# Altium PCB Battery Reader.PcbDoc
Units mm, origin at the board's own origin, x right, y up, seen from the top; angles counter-clockwise.
Board outline 60.95 x 60.95 mm, 4 copper layers (Top Layer, GND, 3V3, Bottom Layer), stack 1.62 mm thick; 71 components, 43 nets, 267 pads, 31 vias.
Unrouted connection lines stored in the file: 65.
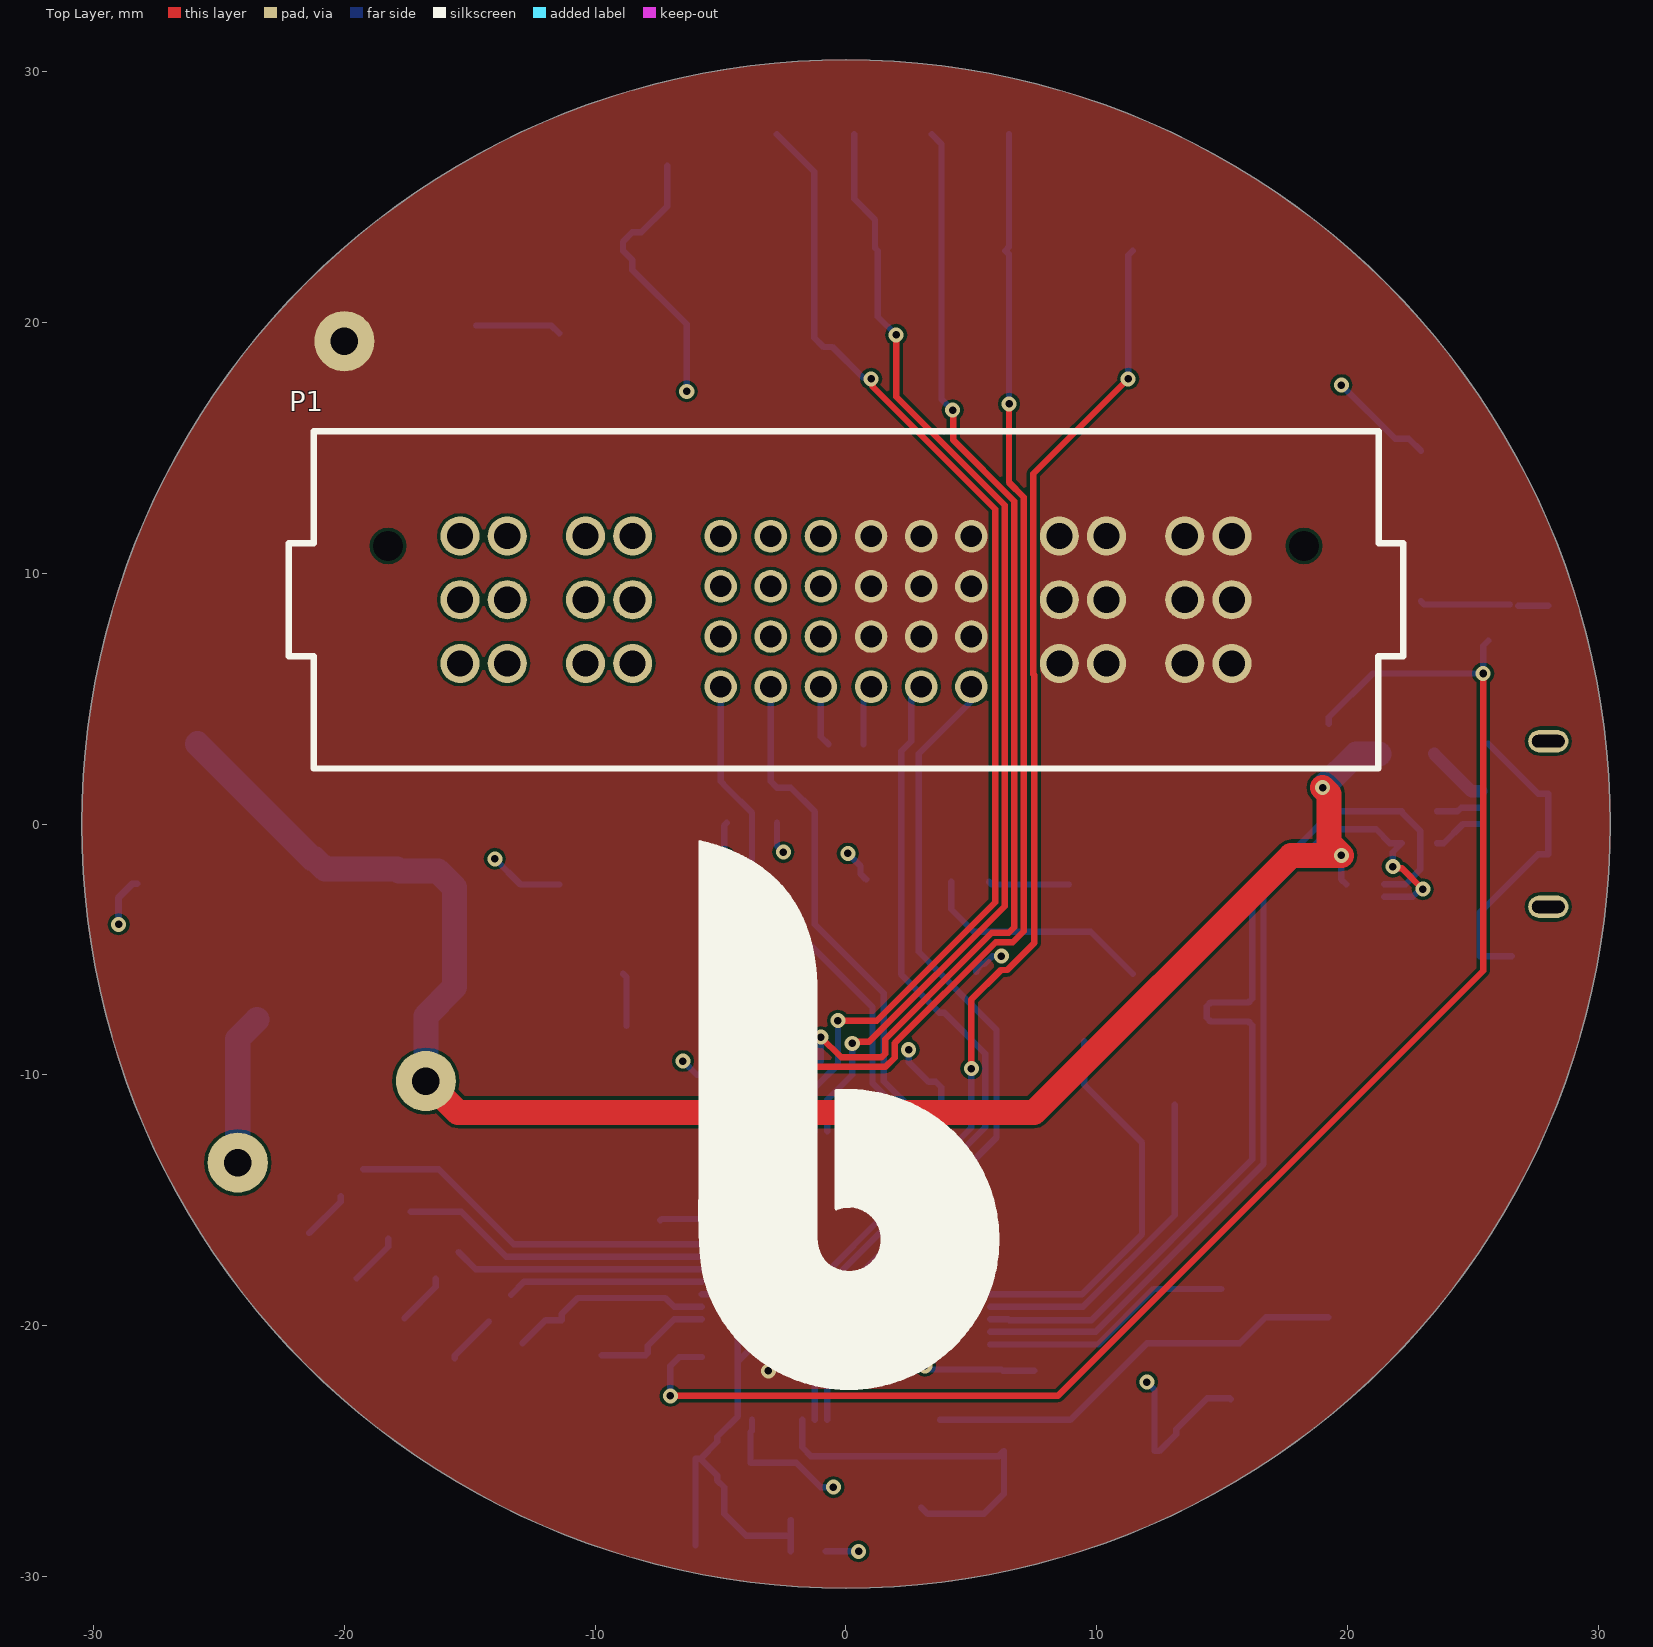
[diagram p0: Top Layer view]
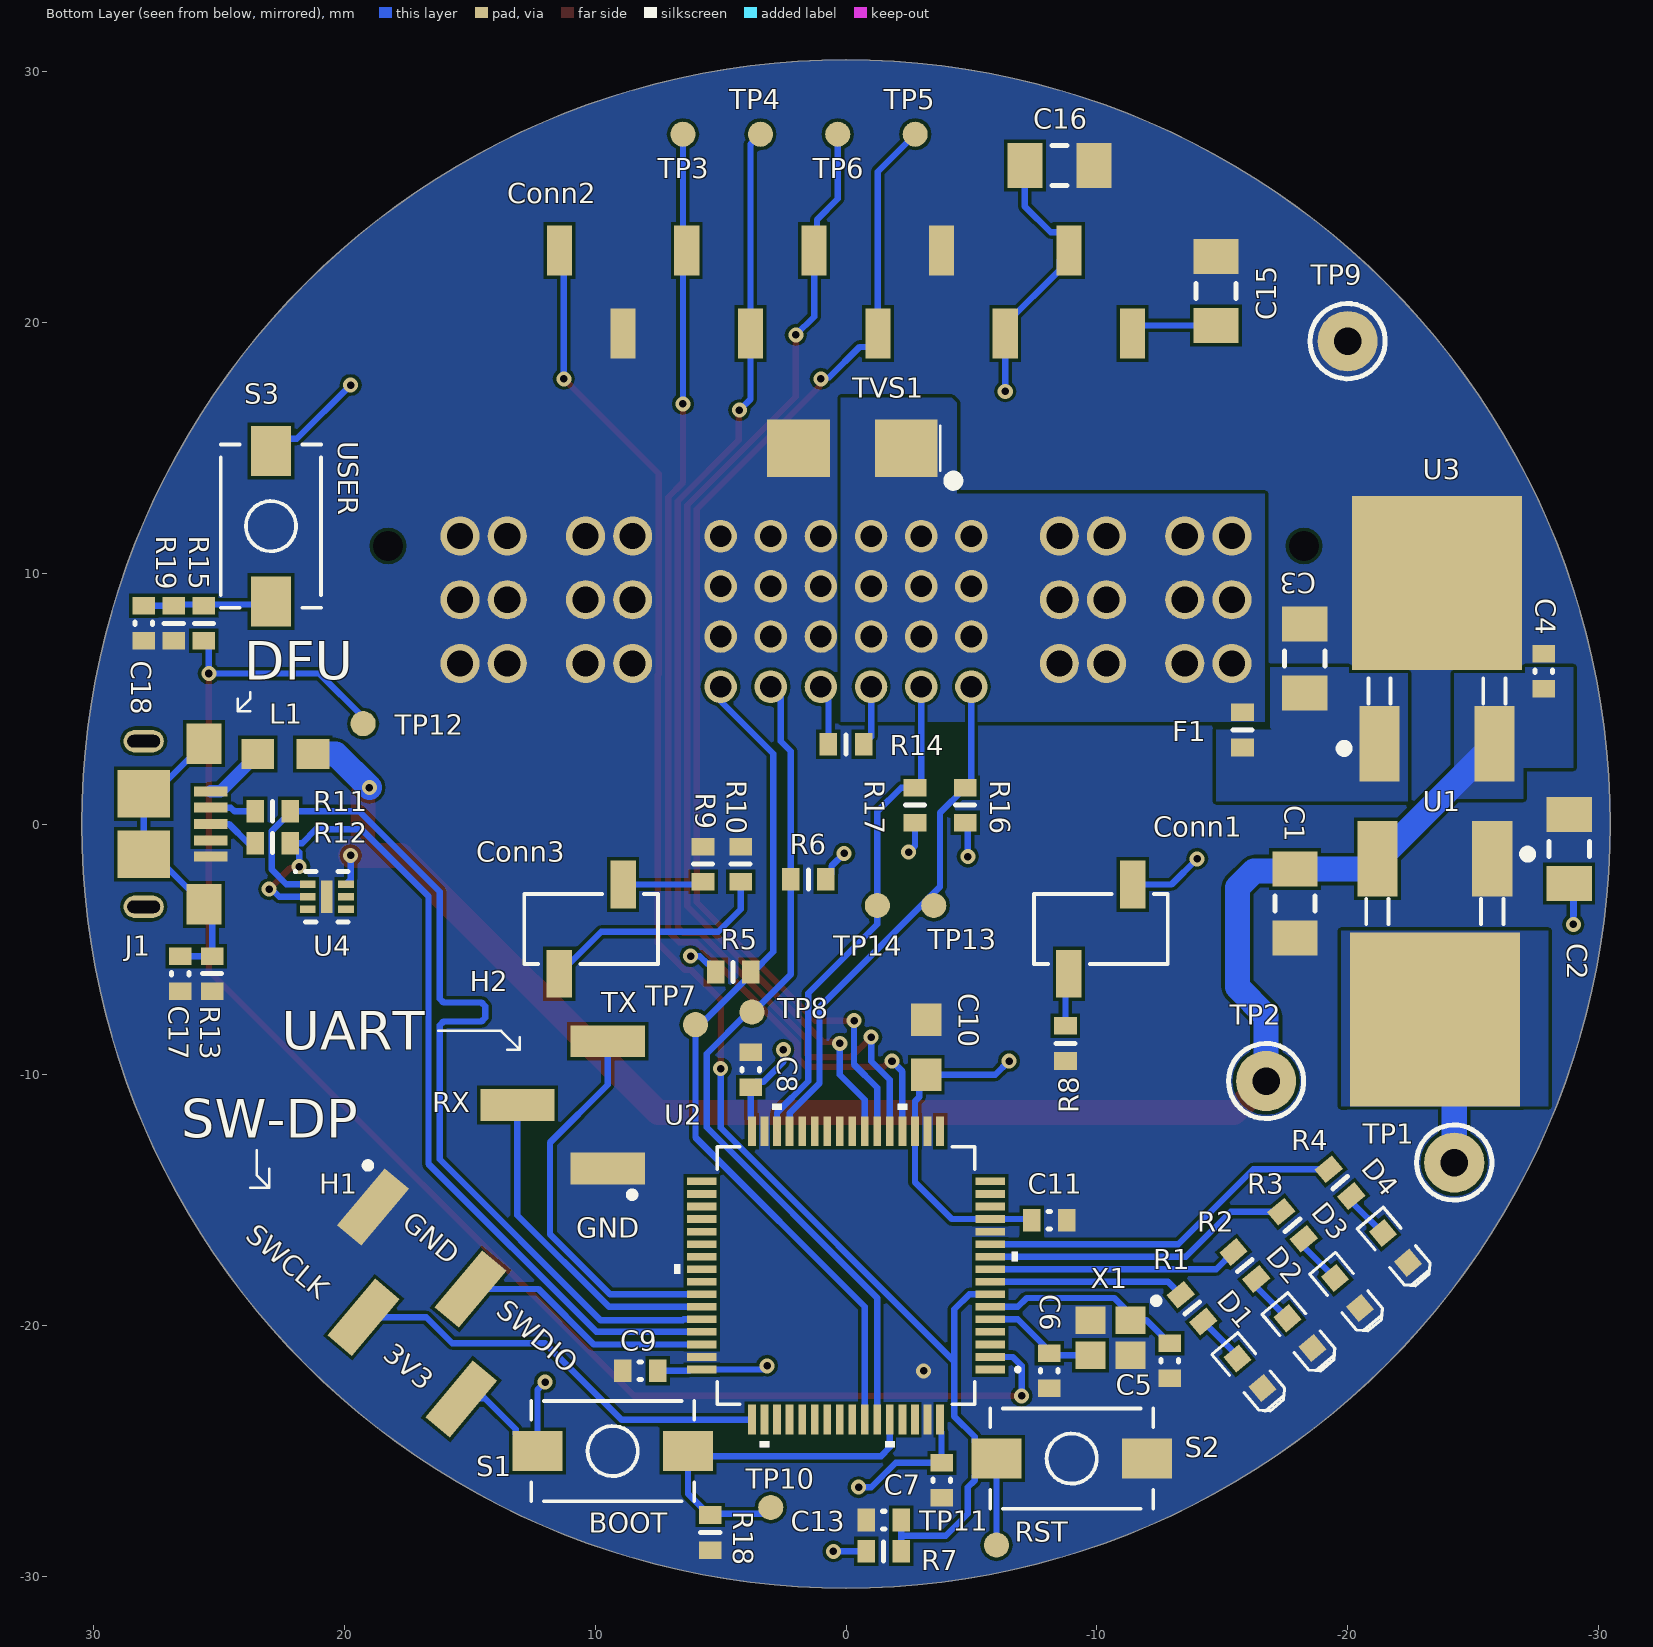
[diagram p1: Bottom Layer view, seen from below]
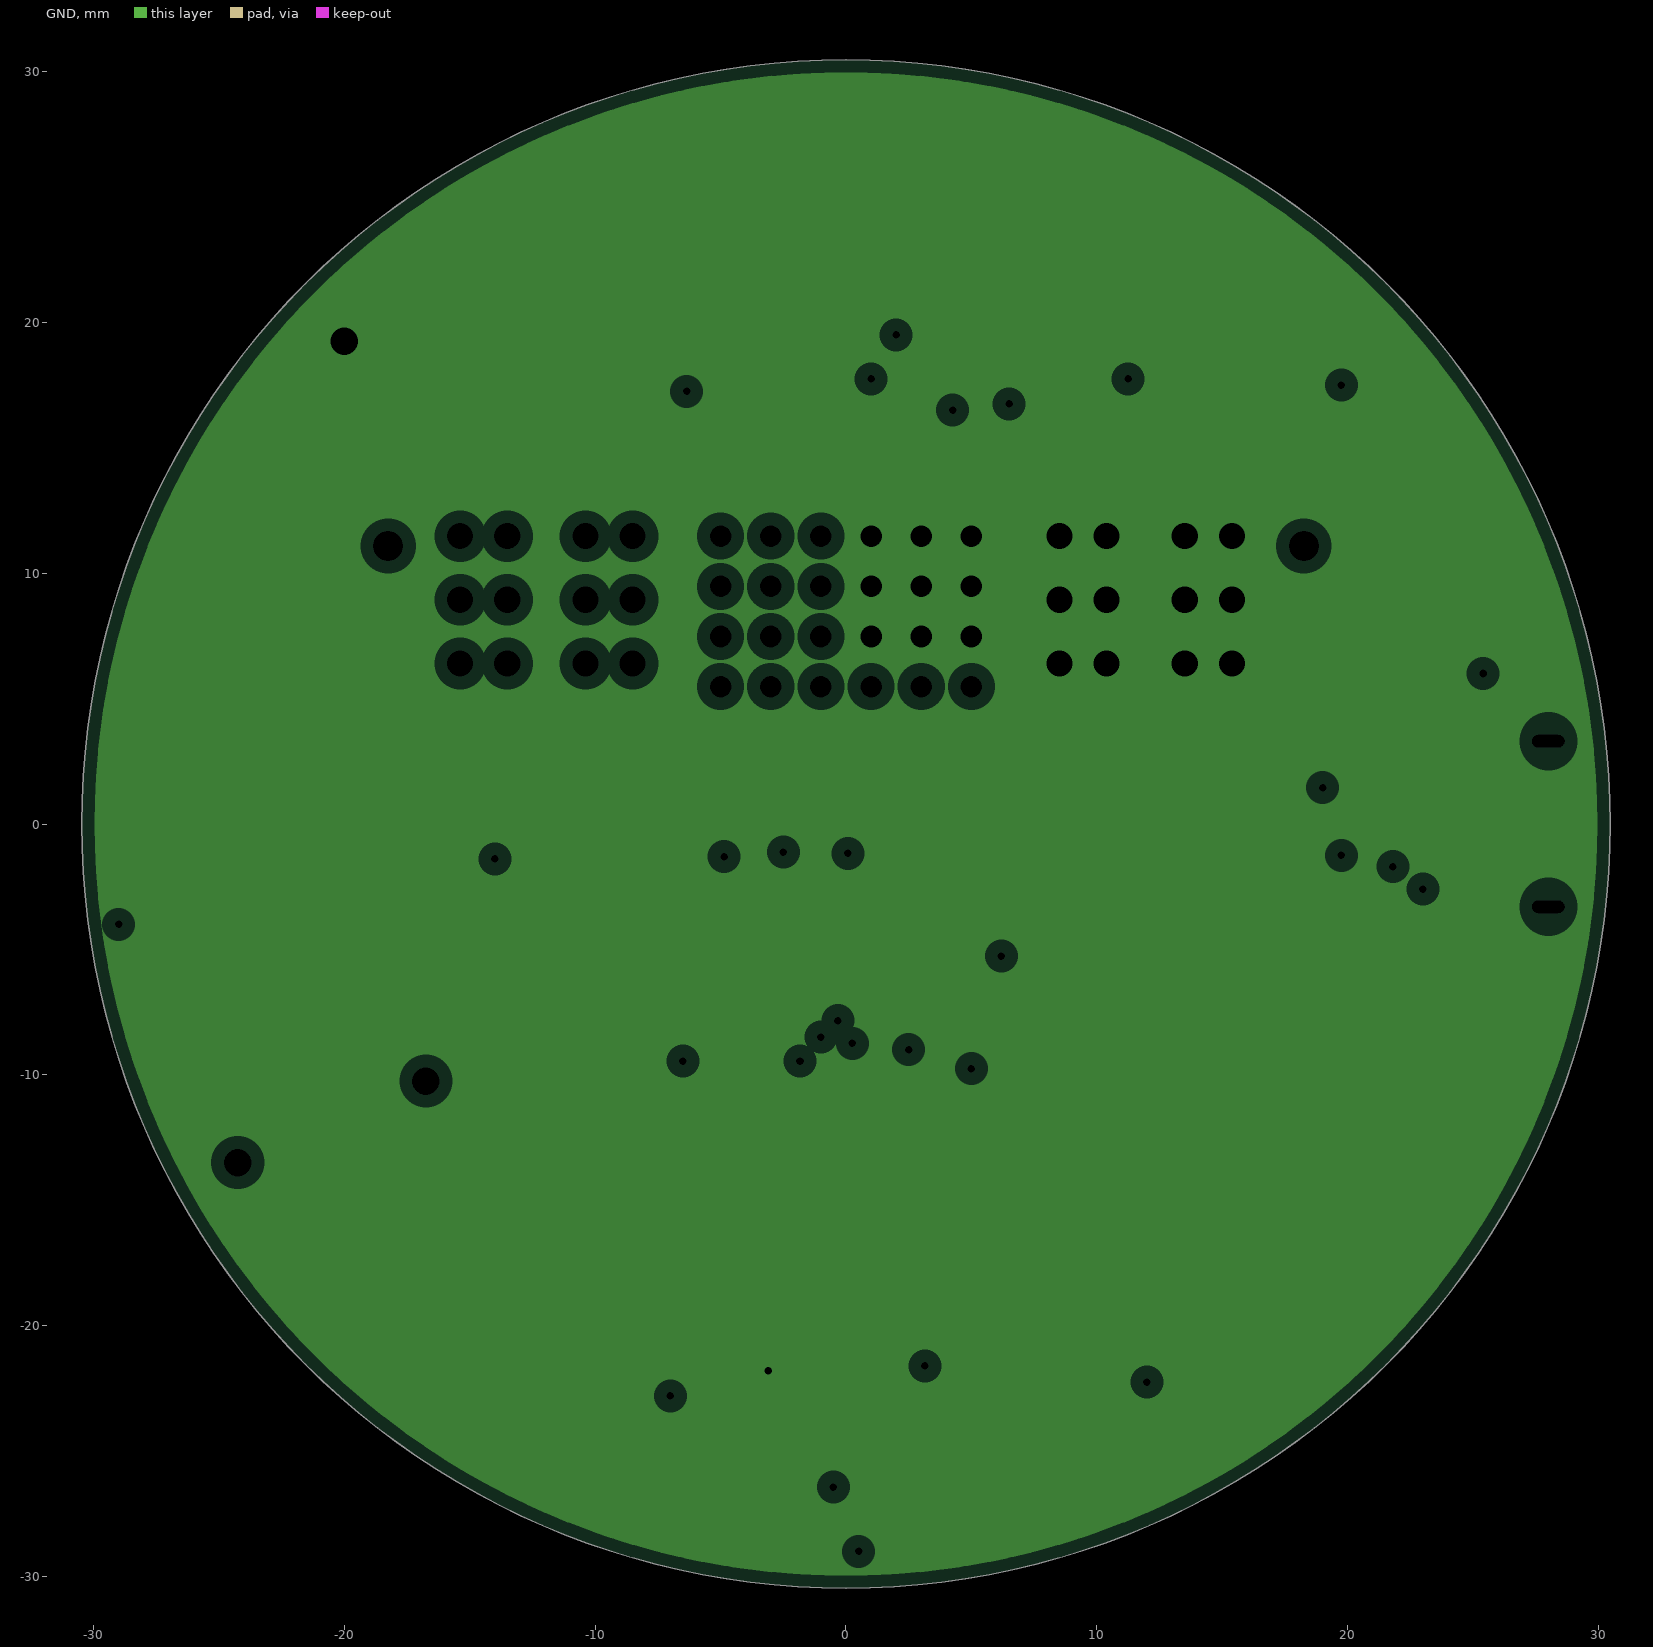
[diagram p2: GND, clearances drawn from the general rule]
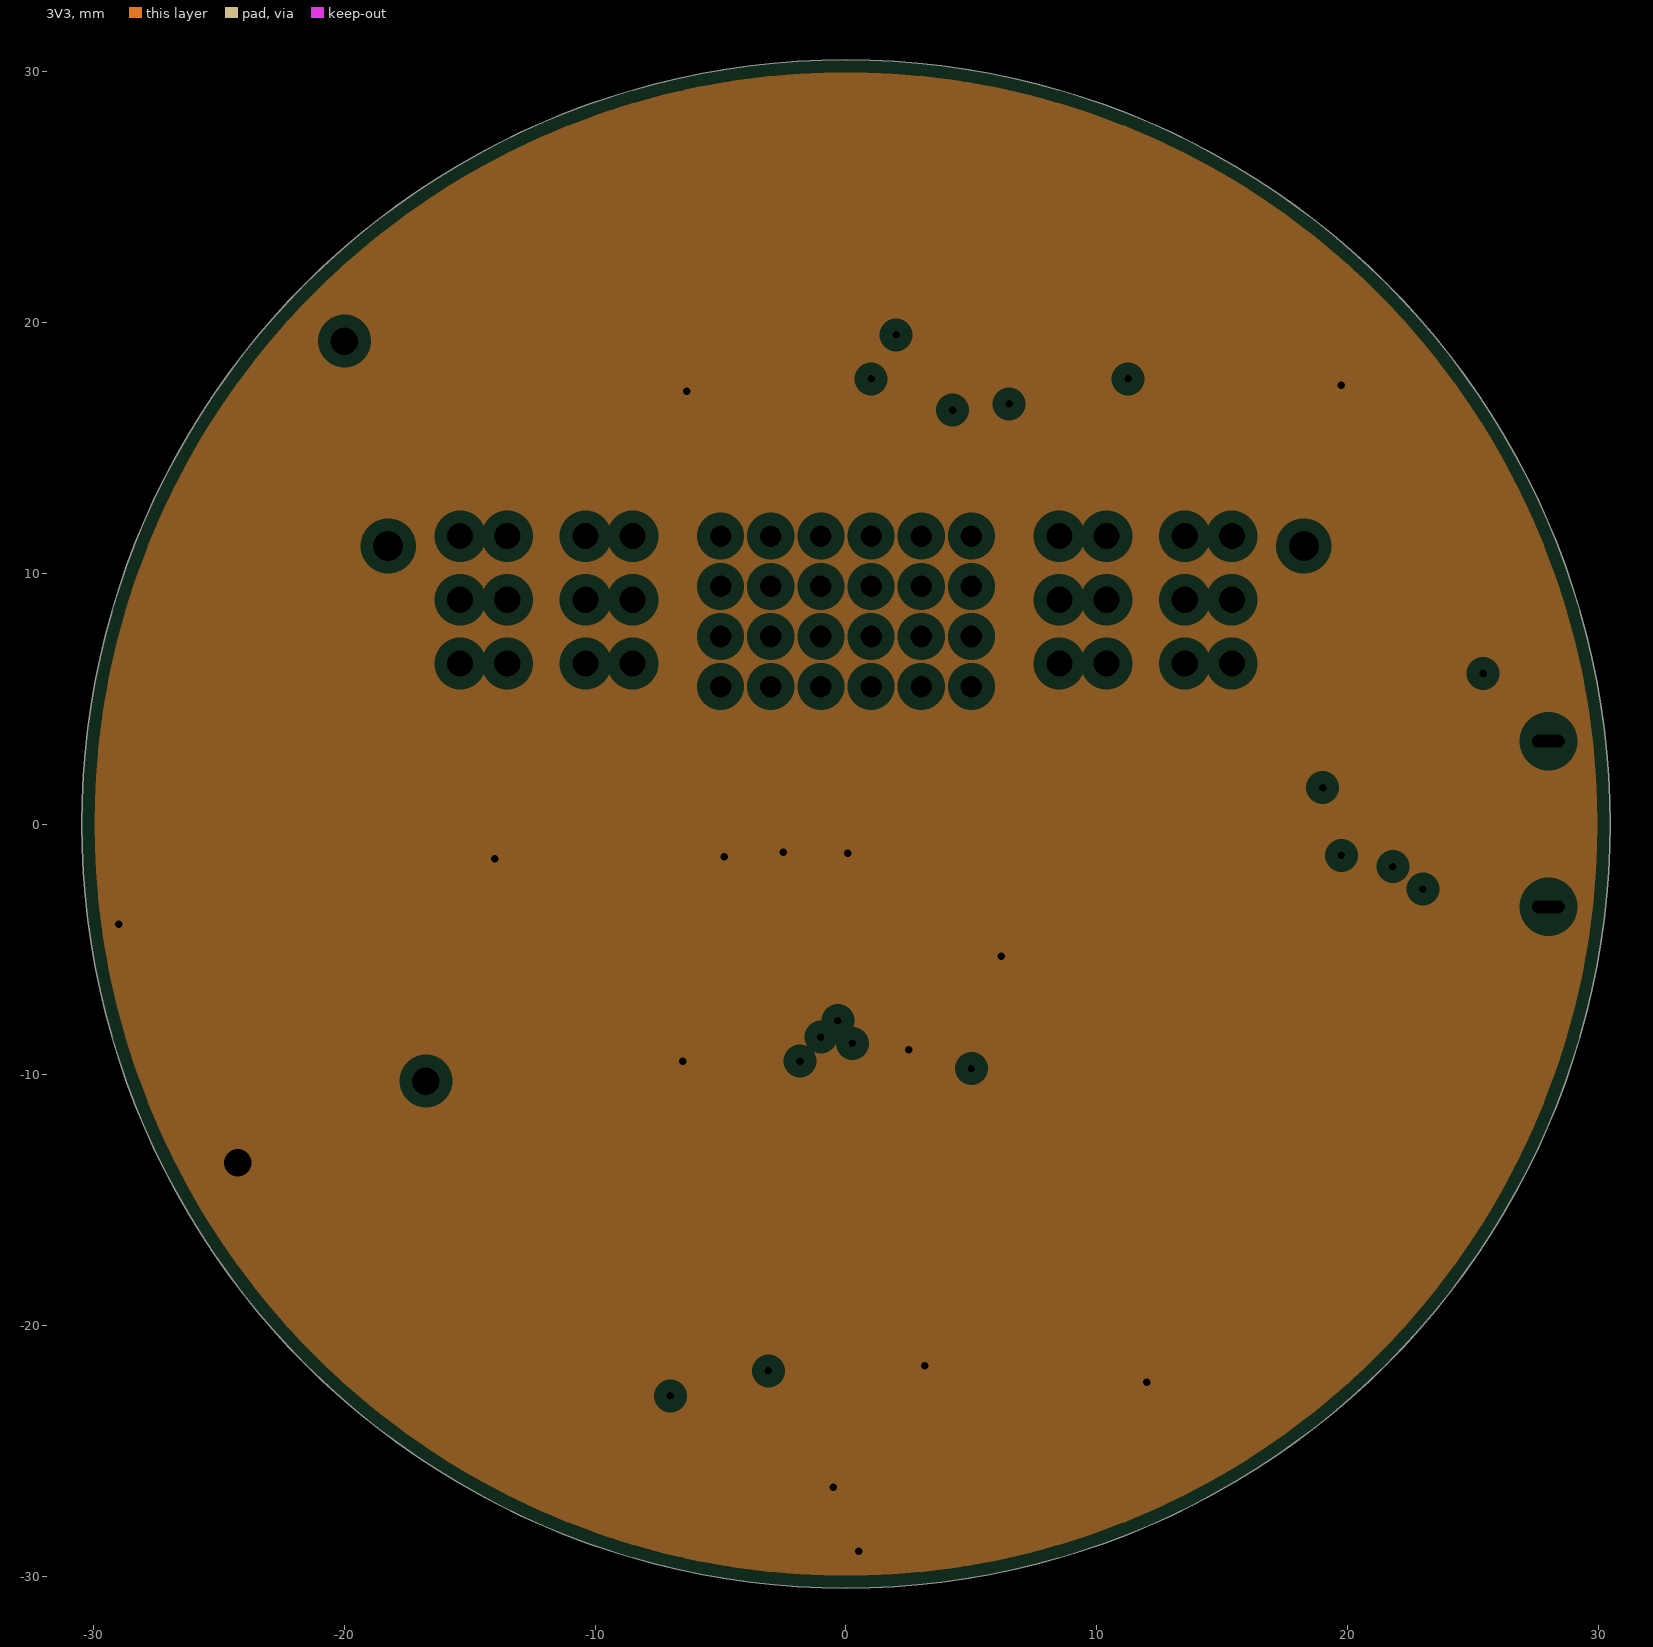
[diagram p3: 3V3, clearances drawn from the general rule]
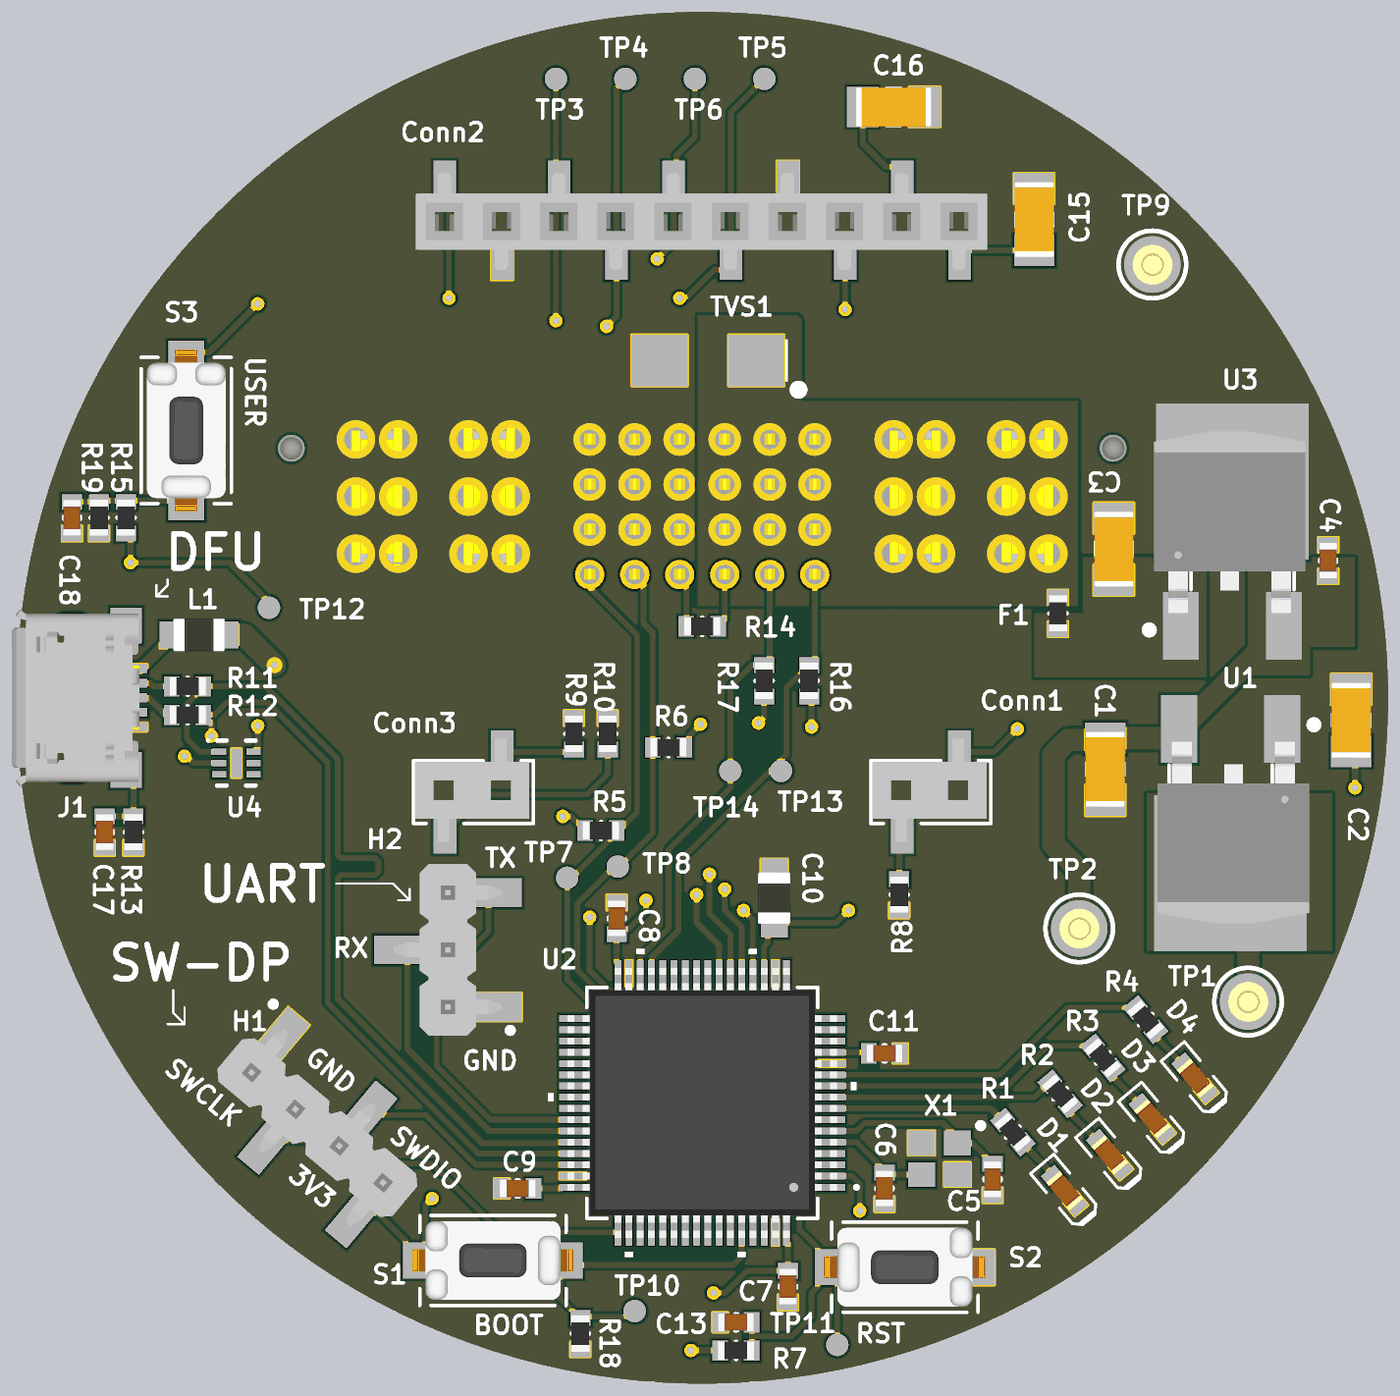
[diagram p4: 3D render of the assembled board from below, using the file's embedded part models]

## Layer stack, top to bottom
Top Solder: solder mask 0.0102, Solder Resist, Dk 3.5
Top Layer: signal copper 0.035
Dielectric 1: core 0.175, TG130, Dk 4.29
GND: plane copper 0.035, net GND
Dielectric 3: prepreg 1.13, TG150, Dk 3.96
3V3: plane copper 0.035, net 3V3
Dielectric 2: core 0.175, TG130, Dk 4.29
Bottom Layer: signal copper 0.035
Bottom Solder: solder mask 0.0102, Solder Resist, Dk 3.5

## Board outline
0,-30.473 cw(c0,0) -30.473,0 cw(c0,0) 0,30.473 cw(c0,0) 30.473,0 cw(c0,0)

## Design rules (kind name [scope] priority, off if disabled: settings)
Clearance [All] p1: gap=0.127 ignorepadtopadclearanceinfootprint=TRUE
DiffPairsRouting USB [InDifferentialPair('DCON')] p1: maxlimit=0.19 minlimit=0.19 mostfreqgap=0.19 toplayer_minwidth=0.254 toplayer_maxwidth=0.254 toplayer_prefwidth=0.254 bottomlayer_minwidth=0.254 bottomlayer_maxwidth=0.254 bottomlayer_prefwidth=0.254 maxuncoupledlength=12.7
DiffPairsRouting USB2 [InDifferentialPair('USB')] p2: maxlimit=0.19 minlimit=0.19 mostfreqgap=0.19 toplayer_minwidth=0.254 toplayer_maxwidth=0.254 toplayer_prefwidth=0.254 bottomlayer_minwidth=0.254 bottomlayer_maxwidth=0.254 bottomlayer_prefwidth=0.254 maxuncoupledlength=12.7
DiffPairsRouting [All] p3: maxlimit=0.254 minlimit=0.254 mostfreqgap=0.254 toplayer_minwidth=0.381 toplayer_maxwidth=0.381 toplayer_prefwidth=0.381 bottomlayer_minwidth=0.381 bottomlayer_maxwidth=0.381 bottomlayer_prefwidth=0.381 maxuncoupledlength=12.7
MatchedLengths USB_L [InDifferentialPair('DCON')] p1: tolerance=1.1 checknetsindiffpair=TRUE checkdiffpairvsdiffpair=FALSE checkxsignals=FALSE checkothers=FALSE
MatchedLengths USB_L2 [InDifferentialPair('USB')] p2: tolerance=1.1 checknetsindiffpair=TRUE checkdiffpairvsdiffpair=FALSE checkxsignals=FALSE checkothers=FALSE
MinimumSolderMaskSliver [All] p1: minsoldermaskwidth=0.127
PlaneClearance [All] p1: clearance=0.508
PlaneConnect [All] p1: planeconnectstyle=Relief reliefexpansion=0.1 reliefentries=4 reliefconductorwidth=0.254 reliefairgap=0.254
PolygonConnect [All] p1: connectstyle=Direct reliefconductorwidth=0.254 reliefentries=4 polygonreliefangle="90 Angle" airgapwidth=0.2
RoutingVias [All] p1: holewidth=0.711 width=1.27 viastyle="Through Hole" minholewidth=0.711 minwidth=1.27 maxholewidth=0.711 maxwidth=1.27
SilkToSolderMaskClearance [IsPad] p1: minsilkscreentomaskgap=0.127 clearancetoexposedcopper=TRUE
SolderMaskExpansion [All] p1: expansion=0.05
Width [All] p1: maxlimit=1 minlimit=0.254 preferedwidth=0.254 minimp=50.000000 maximp=50.000000 favimp=50.000000
25 further rules are at their usual default settings.

## Classes and differential pairs
component class SCH1: C1 C2 C3 C4 C5 C6 C7 C8 C9 C10 C11 C13 C18 D1 D2 D3 D4 R1 R2 R3 R4 R5 R6 R7 R15 R16 R17 R18 R19 S1 S2 S3 TP1 TP2 TP3 TP4 TP5 TP6 TP7 TP8 TP9 TP10 TP11 TP12 TP13 TP14 U1 U2 U3 X1
component class SCH2: ACC1 C15 C16 C17 Conn1 Conn2 Conn3 F1 H1 H2 J1 L1 P1 R8 R9 R10 R11 R12 R13 R14 TVS1 U4
differential pair DCON: +DCON_P -DCON_N
differential pair USB: +USB_P -USB_N

## Components (designator, comment, footprint, x,y, rotation, side; value= is the part's Value field where it differs from the comment)
C1 "10uF" "1206 CAPACITOR" -17.907,-3.175 r90 bottom
C2 "10uF" "1206 CAPACITOR" -28.833,-1 r270 bottom
C3 "1uF" "1206 CAPACITOR" -18.288,6.604 r270 bottom
C4 "100nF" "0603 CAPACITOR" -27.813,6.096 r270 bottom
C5 "22pF" "0603 CAPACITOR" -12.9,-21.4 r90 bottom
C6 "22pF" "0603 CAPACITOR" -8.1,-21.8 r90 bottom
C7 "100nF" "0603 CAPACITOR" -3.81,-26.162 r90 bottom
C8 "100nF" "0603 CAPACITOR" 3.8,-9.8 r270 bottom
C9 "100nF" "0603 Capacitor" 8.2,-21.8 r180 bottom
C10 "4.7uF" "0805 Capacitor" -3.2,-8.9 r270 bottom
C11 "10nF" "0603 CAPACITOR" -8.1,-15.8 r0 bottom
C13 "100nF" "0603 CAPACITOR" -1.5,-27.75 r180 bottom
C15 "1uF" "1206 CAPACITOR" -14.75,21.25 r90 bottom
C16 "1uF" "1206 CAPACITOR" -8.505,26.25 r180 bottom
C17 "100nF" "0603 CAPACITOR" 26.543,-5.969 r90 bottom
C18 "100nF" "0603 Capacitor" 28,8 r90 bottom
Conn1 "SSM-102-L-SV" CON2_1X2_DU_SSM -10.16,-4.19 r0 bottom
Conn2 "NPPC101KFXC-RC" "CONN FMALE 10POS .1\" SMD GOLD" 0,21.21 r180 bottom
Conn3 "SSM-102-L-SV" CON2_1X2_DU_SSM 10.16,-4.19 r0 bottom
D1 "APTD1608LCGCK" "0603 LED" -16.1,-21.9 r230 bottom
D2 "APTD1608LCGCK" "0603 LED" -18.1,-20.3 r230 bottom
D3 "APTD1608LCGCK" "0603 LED" -20,-18.7 r230 bottom
D4 "APTD1608LCGCK" "0603 LED" -21.9,-16.9 r230 bottom
F1 "200mA" "0603 Resistor" -15.808,3.75 r90 bottom
H1 "Header 4pin SMD" "HEADER 4POS 100 MIL SMD" 17.1,-19.1 r220 bottom
H2 "Header 3pin SMD" "HEADER 3POS 100 MIL SMD" 11.3,-11.2 r90 bottom
J1 "USB Micro B" "10118193-0001LF MICRO USB" 28,0 r270 bottom
L1 "60 OHM" "0805 CAPACITOR" 22.352,2.794 r180 bottom
P1 "MPTC-02-24-02-6.30-XX-X-V-LC" MPTC-02-24-02-6.30-XX-X-V-LC 0,8.94 r180 top
R1 "680" "0603 RESISTOR" -13.8,-19.3 r50 bottom
R2 "680" "0603 RESISTOR" -15.9,-17.6 r50 bottom
R3 "680" "0603 RESISTOR" -17.8,-16 r50 bottom
R4 "680" "0603 RESISTOR" -19.7,-14.3 r50 bottom
R5 "10k" "0603 RESISTOR" 4.5,-5.9 r0 bottom
R6 "10k" "0603 RESISTOR" 1.5,-2.21 r180 bottom
R7 "10k" "0603 RESISTOR" -1.5,-29 r0 bottom
R8 "ESR03EZPJ270" "0603 RESISTOR" -8.75,-8.75 r90 bottom value=27
R9 "CRCW06037R15FKEA" "0603 RESISTOR" 5.7,-1.6 r270 bottom
R10 "10R" "0603 RESISTOR" 4.2,-1.6 r270 bottom
R11 "ESR03EZPJ270" "0603 RESISTOR" 22.86,0.508 r180 bottom value=27
R12 "ESR03EZPJ270" "0603 RESISTOR" 22.86,-0.762 r180 bottom value=27
R13 "100k" "0603 RESISTOR" 25.273,-5.969 r90 bottom
R14 "10k" "0603 RESISTOR" 0,3.175 r180 bottom
R15 "10k" "0603 Resistor" 25.6,8 r90 bottom
R16 "10k" "0603 Resistor" -4.75,0.75 r90 bottom
R17 "10k" "0603 Resistor" -2.75,0.75 r90 bottom
R18 "100k" "0603 RESISTOR" 5.414,-28.25 r90 bottom
R19 "100k" "0603 RESISTOR" 26.8,8 r90 bottom
S1 "Tactile Switches Reset" "TACT SWITCH - PANASONIC" 9.3,-25 r0 bottom
S2 "Tactile Switches Reset" "TACT SWITCH - PANASONIC" -9,-25.3 r180 bottom
S3 "Tactile Switches Reset" "TACT SWITCH - PANASONIC" 22.925,11.875 r90 bottom
TP1 "3122-2-00-15-00-00-08-0" 3122-2-00-15-00-00-08-0 -24.25,-13.5 r180 bottom
TP2 "3122-2-00-15-00-00-08-0" 3122-2-00-15-00-00-08-0 -16.75,-10.25 r180 bottom
TP3 "Testpoint" Testpoint 6.5,27.5 r180 bottom
TP4 "Testpoint" Testpoint 3.414,27.5 r180 bottom
TP5 "Testpoint" Testpoint -2.759,27.5 r180 bottom
TP6 "Testpoint" Testpoint 0.327,27.5 r180 bottom
TP7 "Testpoint" Testpoint 6,-8 r180 bottom
TP8 "Testpoint" Testpoint 3.75,-7.5 r180 bottom
TP9 "3122-2-00-15-00-00-08-0" 3122-2-00-15-00-00-08-0 -20,19.25 r180 bottom
TP10 "Testpoint" Testpoint 3,-27.25 r90 bottom
TP11 "Testpoint" Testpoint -6,-28.75 r90 bottom
TP12 "Testpoint" Testpoint 19.25,4 r90 bottom
TP13 "Testpoint" Testpoint -3.5,-3.25 r90 bottom
TP14 "Testpoint" Testpoint -1.25,-3.25 r90 bottom
TVS1 "SMBJ20CA-13-F" "TVS diode" -0.254,14.986 r0 bottom
U1 "NCP1117DT33T5G" DPAK-3 -23.475,-7.8 r0 bottom
U2 "STM32F072RBT6TR" LQFP64-10X10MM 0,-18 r0 bottom value=Value
U3 "MC7805BDTRKG" DPAK-3 -23.56,9.614 r180 bottom
U4 "ESD Suppressors" "RCLAMP0854P.TCT - SON50P160X65_HS-7N" 20.7,-2.9 r180 bottom
X1 "12MHz" "FH1200001 12MHZ" -10.54,-20.483 r0 bottom

## Footprints (in the part's own frame and the unit in brackets; to place one, negate y for a bottom-side part, rotate by r counter-clockwise, add the part's x,y. Pads: shape width x height; smd on the part's side, far side on the other; paste and mask are expansions set on the pad)
"0603 CAPACITOR" [mm] "Chip Capacitor, Body 1.6x0.8mm, Height 0.55mm, IPC High Density"
  rect 0.7x0.9 smd: 1(-0.7,0) 2(0.7,0)
  silkscreen extent -0.05,-0.35 0.05,0.35, body extent -0.8,-0.4 0.8,0.4, height 0.6
"0603 Capacitor" [mm] "Chip Capacitor, Body 1.6x0.8mm, Height 0.55mm, IPC High Density"
  rect 0.7x0.9 smd: 1(-0.7,0) 2(0.7,0)
  silkscreen extent -0.05,-0.35 0.05,0.35, body extent -0.8,-0.4 0.8,0.4, height 0.6
"0603 LED" [mm]
  rect 0.8x0.8 smd: 1(0.775,0) 2(-0.775,0)
  silkscreen extent -1.55,-0.68 1.68,0.68, body extent -0.8,-0.4 0.8,0.4, height 0.75
"0603 Resistor" [mm] "Chip Resistor, Body 1.6x0.8mm, IPC High Density"
  rect 0.7x0.9 smd: 1(-0.7,0) 2(0.7,0)
  silkscreen extent 0,-0.38 0,0.38, body extent -0.8,-0.4 0.8,0.4, height 0.41
"0603 RESISTOR" [mm] "Chip Resistor, Body 1.6x0.8mm, IPC High Density"
  rect 0.7x0.9 smd: 1(-0.7,0) 2(0.7,0)
  silkscreen extent 0,-0.38 0,0.38, body extent -0.8,-0.4 0.8,0.4, height 0.41
"0805 Capacitor" [mm] "Chip Inductor, 2-Leads, Body 2,10x1,25mm, IPC Medium Density"
  rect 1.3x1.2 smd: 1(-1.1,0) 2(1.1,0)
  body extent -1.15,-0.72 1.15,0.72, height 1.45
"0805 CAPACITOR" [mm] "Chip Inductor, 2-Leads, Body 2,10x1,25mm, IPC Medium Density"
  rect 1.3x1.2 smd: 1(-1.1,0) 2(1.1,0)
  body extent -1.15,-0.72 1.15,0.72, height 1.45
"1206 CAPACITOR" [mm]
  rect 1.4x1.8 smd: 1(-1.375,0) 2(1.375,0)
  silkscreen extent -0.3,-0.8 0.3,0.8, body extent -1.68,-0.87 1.68,0.87, height 1.8
3122-2-00-15-00-00-08-0 [mm] "Mill-Max 3122-2-00-15-00-00-08-0"
  round 2.4 hole 1.1: 1(0,0)
  silkscreen extent -1.5,-1.5 1.5,1.5, body extent -0.88,-0.9 0.9,0.88, height 7.62
"10118193-0001LF MICRO USB" [mm] "10118193-0001LF Micro USB"
  oval 0.9x1.6 hole 0.5 slot 1.3 at 90 deg: 0(-3.3,0) 0(3.3,0)
  rect 0.4x1.35 smd: 1(-1.3,2.675) 2(-0.65,2.675) 3(0,2.675) 4(0.65,2.675) 5(1.3,2.675)
  rect 1.6x1.4 smd: 6(-3.2,2.4) 6(3.2,2.4)
  rect 1.9x2.1 smd: 6(-1.2,0) 6(1.2,0)
  body extent -3.93,-2.66 3.93,3, height 2.78
CON2_1X2_DU_SSM [mil]
  rect 40x75 smd paste+0 mask+0: 1(-50,-70) 2(50,70)
  silkscreen extent -105,-55 105,55, body extent -98,-93 102,87, height 298
"CONN FMALE 10POS .1\" SMD GOLD" [mm] "CONN FMALE 10POS .1\" SMD GOLD"
  rect 1x2 smd: 1(11.43,-1.65) 2(8.89,1.65) 3(6.35,-1.65) 4(3.81,1.65) 5(1.27,-1.65) 6(-1.27,1.65) 7(-3.81,-1.65) 8(-6.35,1.65) 9(-8.89,-1.65) 10(-11.43,1.65)
  body extent -18.05,-25.8 18.1,2.1, height 10.6
DPAK-3 [mm]
  rect 1.6x3 smd paste+0 mask+0: 1(-2.29,-6.413) 3(2.29,-6.413)
  rect 6.782x6.934 smd paste+0 mask+0: 2(0,0)
  silkscreen extent -3.79,-6.69 2.73,-3.8, body extent -3.49,-5.84 3.24,2.22, height 1.7
"FH1200001 12MHZ" [mm]
  rect 1.2x1.1 smd: 1(-0.8,-0.7) 2(0.8,-0.7) 3(0.8,0.7) 4(-0.8,0.7)
  silkscreen extent -1.95,-1.6 -1.7,-1.35, body extent -1.25,-1 1.25,1, height 0.7
"HEADER 3POS 100 MIL SMD" [mm]
  rect 1.27x2.96 smd: 1(-2.54,-1.8) 2(0,1.8) 3(2.54,-1.8)
  silkscreen extent -3.7,-2.9 -3.45,-2.65, body extent -3.81,-2.4 3.81,2.4, height 9.63
"HEADER 4POS 100 MIL SMD" [mm]
  rect 1.27x2.96 smd: 1(-3.81,1.8) 2(-1.27,-1.8) 3(1.27,1.8) 4(3.81,-1.8)
  silkscreen extent -5.15,2.82 -4.9,3.07, body extent -5.08,-2.4 5.08,2.4, height 9.6
LQFP64-10X10MM [mil]
  rect 47x12 smd: 1(-226.38,147.64) 2(-226.38,127.95) 3(-226.38,108.27) 4(-226.38,88.58) 5(-226.38,68.9) 6(-226.38,49.21) 7(-226.38,29.53) 8(-226.38,9.84) 9(-226.38,-9.84) 10(-226.38,-29.53) 11(-226.38,-49.21) 12(-226.38,-68.9) 13(-226.38,-88.58) 14(-226.38,-108.27) 15(-226.38,-127.95) 16(-226.38,-147.64) 33(226.38,-147.64) 34(226.38,-127.95) 35(226.38,-108.27) 36(226.38,-88.58) 37(226.38,-68.9) 38(226.38,-49.21) 39(226.38,-29.53) 40(226.38,-9.84) 41(226.38,9.84) 42(226.38,29.53) 43(226.38,49.21) 44(226.38,68.9) 45(226.38,88.58) 46(226.38,108.27) 47(226.38,127.95) 48(226.38,147.64)
  rect 12x47 smd: 17(-147.64,-226.38) 18(-127.95,-226.38) 19(-108.27,-226.38) 20(-88.58,-226.38) 21(-68.9,-226.38) 22(-49.21,-226.38) 23(-29.53,-226.38) 24(-9.84,-226.38) 25(9.84,-226.38) 26(29.53,-226.38) 27(49.21,-226.38) 28(68.9,-226.38) 29(88.58,-226.38) 30(108.27,-226.38) 31(127.95,-226.38) 32(147.64,-226.38) 49(147.64,226.38) 50(127.95,226.38) 51(108.27,226.38) 52(88.58,226.38) 53(68.9,226.38) 54(49.21,226.38) 55(29.53,226.38) 56(9.84,226.38) 57(-9.84,226.38) 58(-29.53,226.38) 59(-49.21,226.38) 60(-68.9,226.38) 61(-88.58,226.38) 62(-108.27,226.38) 63(-127.95,226.38) 64(-147.64,226.38)
  silkscreen extent -273,-270 270,270, body extent -236,-236 236,236, height 63
MPTC-02-24-02-6.30-XX-X-V-LC [mm] "Samtec Power Strip 30A series MPTC"
  round 0 hole 1.19 unplated: 0(-18.255,-2.145) 0(18.255,-2.145)
  round 1.3 hole 0.86 mask+0.075: A1(-5,-2.535) A2(-3,-2.535) A3(-1,-2.535) A4(1,-2.535) A5(3,-2.535) A6(5,-2.535) B1(-5,-0.535) B2(-3,-0.535) B3(-1,-0.535) B4(1,-0.535) B5(3,-0.535) B6(5,-0.535) C1(-5,1.465) C2(-3,1.465) C3(-1,1.465) C4(1,1.465) C5(3,1.465) C6(5,1.465) D1(-5,3.465) D2(-3,3.465) D3(-1,3.465) D4(1,3.465) D5(3,3.465) D6(5,3.465)
  round 1.56 hole 1.04 mask+0.075: P1(-15.385,-2.54) P1(-15.385,0) P1(-15.385,2.54) P1(-13.505,-2.54) P1(-13.505,0) P1(-13.505,2.54) P2(-10.385,-2.54) P2(-10.385,0) P2(-10.385,2.54) P2(-8.505,-2.54) P2(-8.505,0) P2(-8.505,2.54) P3(8.505,-2.54) P3(8.505,0) P3(8.505,2.54) P3(10.385,-2.54) P3(10.385,0) P3(10.385,2.54) P4(13.505,-2.54) P4(13.505,0) P4(13.505,2.54) P4(15.385,-2.54) P4(15.385,0) P4(15.385,2.54)
  silkscreen extent -22.22,-6.72 22.22,6.73, body extent -21.72,-6.22 21.73,6.23, height 11.38
"RCLAMP0854P.TCT - SON50P160X65_HS-7N" [mm] "RCLAMP0854P.TCT - SON, 6-Leads, Body 1,60x1,60mm, Pitch 0,50mm, Thermal Pad 1,18x0,28mm, IPC Medium Density"
  rect 0.63x0.3 smd: 1(-0.76,0.5) 2(-0.76,0) 3(-0.76,-0.5) 4(0.76,-0.5) 5(0.76,0) 6(0.76,0.5)
  rect 0.45x1.3 smd: 7(0,0)
  silkscreen extent -1.3,-1 0.85,1.05, body extent -0.85,-0.85 0.85,0.85, height 0.65
"TACT SWITCH - PANASONIC" [mm] "Tact Switch - panasonic"
  rect 2x1.6 smd: 1(-3,0) 2(3,0)
  silkscreen extent -3.25,-2 3.25,2, body extent -3.6,-1.75 3.6,1.75, height 5
Testpoint [mm] "Testpoint"
  round 1 smd: 1(0,0)
"TVS diode" [mm]
  rect 2.5x2.3 smd: 1(-2.15,0) 2(2.15,0)
  silkscreen extent -4.22,-0.9 -3.5,1.5, body extent -2.56,-1.34 2.56,1.34, height 2.25

## Part data
C1 C2: library part "CAP CER 10UF 35V X7R 1206", "CAP CER 10UF 35V X7R 1206", Manufacturer="Taiyo Yuden", MPN=GMK316AB7106KL-TR, Supplier Part Number 1=587-3007-1-ND, Supplier 1=Digi-Key
C3 C15 C16: library part "Capacitor 1uF 50V", "Multilayer Ceramic Capacitors MLCC - SMD/SMT 1206 1.0uF 50V X7R 20%", Manufacturer=TDK, MPN=C3216X7R1H105M160AB, SPN=810-C3216X7R1H105M, Supplier=Mouser
C4 C7 C8 C9 C13 C17 C18: library part "CAP CER 0.1UF 50V X7R 0603", "CAP CER 0.1UF 50V X7R 0603", Manufacturer="Samsung Electro-Mechanics", MPN=CL10B104KB8NNNC, Supplier Part Number 1=1276-1000-1-ND, Supplier 1=Digi-Key
C5 C6: library part "CAP CER 22PF 50V X7R 0603", "CAP CER 22PF 50V X7R 0603", Manufacturer="AVX Corporation", MPN=06035C220JAT2A, Supplier Part Number 1=478-6204-1-ND, Supplier 1=Digi-Key
C10: library part "Capacitor 4.7uF 25V", "Multilayer Ceramic Capacitors MLCC - SMD/SMT 4.7uF 25Volts 10%", Manufacturer="Murata Electronics", MPN=GRM21BR61E475KA12K, SPN=81-GRM21BR61E475KA2K, Supplier=Mouser
C11: library part "Capacitor 10nF", "Multilayer CeramicCapacitors MLCC - SMD/SMT 100volts .01uF 10% X7R AUTO ESD", Manufacturer=Kemet, MPN=C0603C103K1RECAUTO, SPN=80-C0603C103K1REAUTO, Supplier=Mouser
Conn1 Conn3: library part "CONN RCPT .100\" 2POS SNGL VERT", "CONN RCPT .100\" 2POS SNGL VERT", Colour=Black, Contact Resistance=10mR, Current Rating=6.9A, Manufacturer 1=Samtec, Max Operating Temperature=125°C, Max Voltage Rating (AC)=475V, Min Operating Temperature=-55°C, Supplier Part Number 1=SAM1148-02-ND, ComponentLink1Description=https://datasheet.ciiva.com/25617/0900766b811594ab-25617394.pdf, ComponentLink1URL=https://datasheet.ciiva.com/25617/0900766b811594ab-25617394.pdf, ComponentLink2Description=https://datasheet.ciiva.com/746/ssm-1xx-xxx-xx-xx-xx-x-xx-xx-mkt-746741.pdf, ComponentLink2URL=https://datasheet.ciiva.com/746/ssm-1xx-xxx-xx-xx-xx-x-xx-xx-mkt-746741.pdf, ComponentLink3Description=https://datasheet.ciiva.com/22677/81944-22677814.pdf, ComponentLink3URL=https://datasheet.ciiva.com/22677/81944-22677814.pdf, Connector Type=Receptacle,Socket, Contact Material=Bronze, Contact Plating=Nickel,Gold, Depth=2.54mm, Description 1="SAMTEC         SSM-102-L-SV             Board-To-Board Connector, Vertical, SSM Series, 2 Contacts, Receptacle, 2.54 mm, Surface Mount", Gender=Receptacle, Housing Colour=Black, Housing Material=Polymer, Lead Free="Lead Free", Lead Pitch=2.54mm, Length=5.08mm, Manufacturer Part Number 1=SSM-102-L-SV, Max Current Rating=6.9A, Mount="Surface Mount", MPN=SSM-102-L-SV, Number of Contacts=2, Number of Positions=2, Number of Rows=1, Orientation=Straight, Packaging=Bulk, Pitch=2.54mm, Pricing 1="1=2.18, 10=1.953, 100=1.6081, 500=1.2711, 1000=1.0912, 5000=0.9955, 10000=0.9572 (USD)", Radiation Hardening=No, REACH SVHC="No SVHC", Stock 1=339, Supplier 1=Digi-Key, Termination=Solder, Voltage Rating=475V, Voltage Rating (AC)=475V
Conn2: library part "CONN FMALE 10POS .1\" SMD GOLD", "CONN FMALE 10POS .1\" SMD GOLD", Colour=Black, Manufacturer 1=Sullins, Package Quantity=1, Supplier Part Number 1=S5641-ND, ComponentLink1Description=https://datasheet.ciiva.com/745/npxcxx1kfxx-rc10487-d-745368.pdf, ComponentLink1URL=https://datasheet.ciiva.com/745/npxcxx1kfxx-rc10487-d-745368.pdf, Connector Type=Socket,Header, Contact Material=Bronze, Contact Plating=Gold, Description 1="CONN FMALE 10POS .1\" SMD GOLD", Height=7.1mm, Housing Colour=Black, Housing Material=Nylon, Lead Free="Lead Free", Length=25.4mm, Manufacturer=NPPC101KFXC-RC, Manufacturer Part Number 1=NPPC101KFXC-RC, Mount="Surface Mount", MPN=NPPC101KFXC-RC, Number of Positions=10, Number of Rows=1, Packaging=Bulk, Pitch=0.1inch, Pricing 1="1=1.32, 10=1.195, 100=1.0244, 500=0.8537, 1000=0.7317, 5000=0.7046 (USD)", Stock 1=1156, Supplier 1=Digi-Key, Termination=Solder, Width=2.5mm
D1 D2 D3 D4: library part "Standard LEDs - SMD 0603 Dome Lens LED Green- 570nm", "Standard LEDs - SMD 0603 Dome Lens LED Green- 570nm", Manufacturer=Kingbright, MPN=APTD1608LCGCK, SPN=604-APTD1608LCGCK, Supplier=Digi-Key
F1: library part "Fuse 200mA 0603", Manufacturer="AVX Corporation", MPN=F0603G0R20FNTR, SPN=478-6874-1-ND, Supplier=Digi-Key
H1: "CONN HEADER 4POS VERT 2.54MM SMD", Manufacturer="Molex, LLC", MPN=0878980426, SPN=WM8617-ND, Supplier=Digikey
H2: "3 Positions Header, Breakaway Connector 0.100\" (2.54mm) Surface Mount Tin", Manufacturer="Molex, LLC", MPN=0878980306, SPN=WM9810-ND, Supplier=Digikey
J1: "USB Connectors 5P MICRO USB TYPE B RECEPTACLE W/ PEGS", Manufacturer="Amphenol FCI", MPN=10118193-0001LF, SPN=649-10118193-0001LF, Supplier=Mouser
L1: library part "FERRITE BEAD 60 ohm", "FERRITE BEAD 60 OHM 0805 1LN", Manufacturer="Taiyo Yuden", MPN=BKP2125HS600-T, SPN=587-1932-1-ND, Supplier=Digikey
P1: "Samtec PowerStrip 30A Signal/Power Combo Connector", Manufacturer=Samtec, MPN=MPTC-02-24-02-6.30-01-L-V
R1 R2 R3 R4: library part "resistor 680 ohm", "Thick Film Resistors - SMD 0603 680ohms 5% AEC-Q200", Manufacturer=Panasonic, MPN=ERJ-3GEYJ681V, SPN=667-ERJ-3GEYJ681V, Supplier=Mouser
R5 R6 R7 R14 R15 R16 R17: library part "RES SMD 10K OHM 5% 1/10W 0603", "RES SMD 10K OHM 5% 1/10W 0603", Manufacturer=Yageo, MPN=RC0603JR-0710KL, Supplier Part Number 1=311-10KGRCT-ND, Supplier 1=Digi-Key
R8 R11 R12: library part "RES SMD 27 OHM 5% 1/4W 0603", "RES SMD 27 OHM 5% 1/4W 0603", Case/Package=0603, Case Code (Metric)=1608, Manufacturer 1=Rohm, Max Operating Temperature=155°C, Max Power Dissipation=250mW, Min Operating Temperature=-55°C, Package Quantity=5000, Resistance=27R, Supplier Part Number 1=RHM27DCT-ND, Temperature Coefficient=200ppm/°C, Tolerance=5%, Case Code (Imperial)=0603, ComponentLink1Description=https://datasheet.ciiva.com/14932/esr-14932374.pdf, ComponentLink1URL=https://datasheet.ciiva.com/14932/esr-14932374.pdf, ComponentLink2Description=https://datasheet.ciiva.com/14928/esr-14928807.pdf, ComponentLink2URL=https://datasheet.ciiva.com/14928/esr-14928807.pdf, Composition="Thick Film", Description 1="RES SMD 27 OHM 5% 1/4W 0603", Height=0.022inch, Length=0.063inch, Manufacturer Part Number 1=ESR03EZPJ270, MPN=ESR03EZPJ270, Number of Terminations=2, Packaging="Cut Tape", Pricing 1="1=0.1, 10=0.087, 100=0.0333, 1000=0.0146, 2500=0.0126 (USD)", Stock 1=22229, Supplier 1=Digi-Key, Width=0.031inch
R9: library part "RES SMD 7.15 OHM 1% 1/10W 0603", "RES SMD 7.15 OHM 1% 1/10W 0603", Case/Package=0603, Case Code (Metric)=1608, Manufacturer 1="Vishay Dale", Max Operating Temperature=155°C, Max Power Dissipation=100mW, Min Operating Temperature=-55°C, Package Quantity=5000, Resistance=7.15R, Supplier Part Number 1=541-7.15HHCT-ND, Temperature Coefficient=100ppm/°C, Tolerance=1%, Voltage Rating=75V, Case Code (Imperial)=0603, ComponentLink1Description=https://datasheet.ciiva.com/2466/dcrcwe3-2466755.pdf, ComponentLink1URL=https://datasheet.ciiva.com/2466/dcrcwe3-2466755.pdf, ComponentLink2Description=https://datasheet.ciiva.com/2466/dcrcwe3-2466756.pdf, ComponentLink2URL=https://datasheet.ciiva.com/2466/dcrcwe3-2466756.pdf, ComponentLink3Description=https://datasheet.ciiva.com/2466/dcrcwe3-2466757.pdf, ComponentLink3URL=https://datasheet.ciiva.com/2466/dcrcwe3-2466757.pdf, ComponentLink4Description=https://datasheet.ciiva.com/5562/dcrcwe3-109170-5562726.pdf, ComponentLink4URL=https://datasheet.ciiva.com/5562/dcrcwe3-109170-5562726.pdf, Composition="Thick Film", Contact Plating=Tin, Depth=0.85mm, Description 1="RES SMD 7.15 OHM 1% 1/10W 0603", Height=0.02inch, Lead Free="Lead Free", Length=1.55mm, Manufacturer Part Number 1=CRCW06037R15FKEA, Military Standard=Not, MPN=CRCW06037R15FKEA, Number of Terminations=2, Packaging="Tape and Reel", Power Rating=100mW, Pricing 1="1=0.1, 10=0.042, 100=0.017, 1000=0.0076, 2500=0.0066 (USD)", Stock 1=21491, Supplier 1=Digi-Key, Weight=7.1E-05oz, Width=0.033inch
R10: library part "RES SMD 10 OHM 5% 1/4W 0603", "RES SMD 10 OHM 5% 1/4W 0603", Case/Package=0603, Manufacturer="Rohm Semiconductor", Manufacturer 1=Rohm, Manufacturer Part Number 1=ESR03EZPF10R0, Max Operating Temperature=155°C, Min Operating Temperature=-55°C, Supplier Part Number 1=RHM10.0ADCT-ND, Temperature Coefficient=100ppm/°C, Tolerance=1%, ComponentLink1Description=http://www.rohm.com/web/global/datasheet/ESR01MZPF/esr-e, ComponentLink1URL=http://www.rohm.com/web/global/datasheet/ESR01MZPF/esr-e, Description 1="RES 10 OHM 1/4W 1% 0603 SMD", Height=0.45mm, Lead Free="Lead Free", Length=1.6mm, MPN=ESR03EZPF10R0, Pricing 1="1=0.14, 10=0.126, 100=0.0484, 1000=0.0213, 2500=0.0184 (USD)", Resistance=10R, SPN=RHM10.0ADCT-ND, Stock 1=261792, Supplier=DigiKey, Supplier 1=Digi-Key, Width=0.8mm
R13 R18 R19: library part "RES SMD 100K OHM 5% 1/10W 0603", "RES SMD 100K OHM 5% 1/10W 0603", Manufacturer=Yageo, MPN=RC0603JR-07100KL, Supplier Part Number 1=311-100KGRCT-ND, Supplier 1=Digi-Key
S1 S2 S3: "Tactile Switches 6.0x3.5mm SMD Light Touch Switch", Manufacturer=Panasonic, MPN=EVQ-PE105K, SPN=667-EVQ-PE105K, Supplier=Mouser
TP1 TP2 TP9: "CONN PC PIN CIRC 0.040DIA GOLD", Manufacturer=Mill-Max, Manufacturer Part Number=3123-2-00-15-00-00-08-0, Package Quantity=500, Supplier Part Number 1=ED1182-ND, Board Thickness=0.062inch, ComponentLink1Description=http://www.mouser.com/ds/2/273/221M-269451.pdf, ComponentLink1URL=http://www.mouser.com/ds/2/273/221M-269451.pdf, ComponentLink2Description=http://www.mill-max.com/assets/pdfs/metric/221M.pdf, ComponentLink2URL=http://www.mill-max.com/assets/pdfs/metric/221M.pdf, Contact Material=Brass, Contact Plating=Gold, Flange Diameter=0.07inch, Gender=Male, Hole Diameter=0.043inch, Insulation=Non-Insulated, Length=0.682inch, Material=Brass, Mount="Through Hole", Mounting Hole Diameter=1.09mm, MPN=3122-2-00-15-00-00-08-0, Outside Diameter=1.78mm, Packaging=Bulk, Plating=Nickel,Gold, Pricing 1="1=0.34, 10=0.323, 25=0.2768, 50=0.2354, 100=0.2261, 250=0.2031, 500=0.1938, 1000=0.1615, 2500=0.1477 (USD)", SPN=ED1277-ND, Stock 1=3576, Supplier=Digi-Key, Supplier 1=Digi-Key, Termination="PC Pin"
TVS1: library part "TVS 20V", "TVS DIODE 20VWM 32.4VC SMA", Manufacturer="Diodes Incorporated", MPN=SMBJ20CA-13-F, SPN=SMBJ20CA-FDICT-ND, Supplier=Digikey
U1: library part "IC REG LINEAR 3.3V 1A DPAK-3", "IC REG LINEAR 3.3V 1A DPAK-3", Manufacturer="ON Semiconductor", MPN=NCP1117DT33T5G, SPN=NCP1117DT33T5GOSCT-ND, Supplier=Digi-Key
U3: library part "IC REG LINEAR 5V 1A DPAK-3", "IC REG LINEAR 5V 1A DPAK-3", Manufacturer="ON Semiconductor", MPN=MC7805BDTRKG, SPN=MC7805BDTRKGOSCT-ND, Supplier=Digi-Key
U4: "ESD Suppressors RCLAMP0854P 4LINES 8V SLP", Manufacturer=Semtech, MPN=RCLAMP0854P.TCT, SPN=947-RCLAMP0854P.TCT, Supplier=Mouser
X1: library part "Crystal 12MHz", "Crystal 12MHz", Manufacturer=Pericom, MPN=FH1200001, SPN=729-FH1200001, Supplier=Mouser
U2: C="Copyright (C) 2016 Accelerated Designs. All rights reserved", Copyright="Copyright (C) 2016 Accelerated Designs. All rights reserved", Manufacturer_Part_Number=STM32F072RBT6TR, MPN=STM32F072RBT6TR, RefDes=RefDes, SPN=497-17363-1-ND, Supplier=Digi-Key, Type=Type, Vendor=STMicroelectronics

## Via types
v1: diameter 0.6, hole 0.3, Top Layer to Bottom Layer, 31 vias

## Nets (pads, with @x,y where several pads share a name; then routed paths per layer and width w, separated by ;. In a path a pad name is that pad's centre, name@x,y a point inside that pad or via, vN(x,y) a via of type N, cw(c..) or ccw(c..) an arc to the next point about the centre after c; other vN are vias at no path point)
3V3: C2.2 C7.2 C8.2 C9.2 C10.2 C11.2 C16.1 Conn1.1 Conn2.2 Conn2.3 H1.4 R5.2 R6.2 R7.2 R16.1 R17.1 S1.2 S3.2 TP1.1 U1.2 U2.13 U2.19 U2.32 U2.48 U2.64 | length 68.5
  Bottom Layer w0.254: -29.023,-3.644 -29.023,-2.948 -28.45,-2.375 C2.2@-28.427,-2.375 ; v1(-29,-4) -29,-3.644 -29,-2.948 C2.2@-28.427,-2.375 ; C2.2@-28.25,-2.375 C2.2@-28.427,-2.375 ; v1(-14,-1.386) -12.975,-2.412 Conn1.1 ; C11.2 -7.35,-15.75 U2.13 -4.216,-15.75 -2.75,-14.284 U2.19 -2.75,-11.047 -2.915,-10.882 -2.915,-10.285 C10.2 -5.95,-10 v1(-6.5,-9.45) ; C16.1 -7.13,24.62 -8.158,23.592 -8.517,23.592 -8.89,23.219 Conn2.2 -8.517,22.487 -8.517,22.086 -6.35,19.919 Conn2.3 v1(-6.35,17.25) ; v1(-4.858,-1.3) -4.858,-0.058 R16.1 ; U2.64 -3.75,-24.195 -3.81,-24.255 C7.2 -1.98,-25.462 -1,-26.442 v1(-0.5,-26.442) ; R17.1 -2.75,-0.872 v1(-2.5,-1.122) ; R7.2 v1(0.5,-29) ; v1(0.075,-1.175) 0.577,-1.677 0.577,-1.987 R6.2 ; v1(2.5,-9) 2.5,-9.488 3.289,-10.277 3.577,-10.277 C8.2 3.8,-11.756 3.75,-11.806 U2.32 ; v1(3.148,-21.6) 3.298,-21.75 U2.48 6.195,-21.75 6.244,-21.8 C9.2 ; R5.2 5.2,-5.8 5.423,-5.577 5.523,-5.577 5.831,-5.269 v1(6.195,-5.269) ; v1(12,-22.25) 12.3,-22.55 S1.2 12.5,-25 13.173,-24.327 13.173,-24.127 14.407,-22.893 15.304,-22.893 H1.4 ; v1(19.75,17.5) 21.893,15.357 22.443,15.357 S3.2
  Bottom Layer w1: TP1.1 -24.25,-8.575 U1.2
5V: C1.2 C4.2 L1.2 TP2.1 U1.3 U3.3 U4.6 | length 69.1
  Top Layer w1: TP2.1 -16.714,-10.25 -15.464,-11.5 7.5,-11.5 17.75,-1.25 v1(19.75,-1.25) 19.25,-0.75 19.25,1.2 v1(19,1.45)
  Bottom Layer w0.254: v1(19.75,-1.25) 19.75,-2.21 U4.6
  Bottom Layer w1: U3.3 -21.264,-1.386 U1.3 -20.772,-1.8 C1.2 -17.832,-1.875 -16.26,-1.875 -15.602,-2.533 -15.602,-6.5 -16.75,-7.648 TP2.1 ; v1(19,1.45) 20.344,2.794 L1.2
BOOT0: R18.2 S1.1 TP10.1 U2.60 | length 14.8
  Bottom Layer w0.254: U2.60 -1.75,-24.85 -1.4,-25.2 6.1,-25.2 S1.1 6.3,-26.7 5.5,-27.5 3.25,-27.5 TP10.1
DCON_N: J1.2 R11.1 | length 1.8
  Bottom Layer w0.254: R11.1 24.381,0.508 24.523,0.65 J1.2
DCON_P: J1.3 R12.1 | length 2.1
  Bottom Layer w0.254: R12.1 23.838,-0.762 24.6,0 J1.3
GND: C1.1 C2.1 C3.1 C4.1 C5.1 C6.1 C7.1 C8.1 C9.1 C10.1 C11.1 C13.1 C15.2 C16.2 C17.1 C18.1 Conn2.4 Conn2.9 D1.1 D2.1 D3.1 D4.1 H1.1 H2.1 J1.5 P1.A1 P1.A2 P1.A3 P1.B1 P1.B2 P1.B3 P1.C1 P1.C2 P1.C3 P1.P1 P1.P2 R8.1 R9.1 R10.1 R13.1 R18.1 R19.1 S2.2 TP9.1 TVS1.2 U1.1 U2.12 U2.18 U2.31 U2.47 U2.63 U3.2 U4.7 X1.2 X1.4
  other v1: -3.098,-21.8
GREEN: Conn3.1 R9.2 | length 3.2
  Bottom Layer w0.254: R9.2 5.812,-2.412 Conn3.1
I2C1_SCL: P1.D1 R5.1 TP7.1 U2.58 | length 34.2
  Bottom Layer w0.254: U2.58 -0.75,-19.25 6,-12.5 6,-8.2 3.75,-5.95 2.9,-5.1 2.9,2.8 5,4.9 P1.D1
I2C1_SDA: P1.D2 R6.1 TP8.1 U2.59 | length 33.9
  Bottom Layer w0.254: U2.59 -1.25,-18.897 5.554,-12.093 5.554,-9.154 3.925,-7.525 3.725,-7.525 2.2,-6 R6.1 2.2,2.9 2.6,3.3 2.6,5.075 P1.D2
LED1: R1.2 U2.8 | length 7.8
  Bottom Layer w0.254: R1.2 -12.836,-18.25 U2.8
LED2: R2.2 U2.9 | length 10
  Bottom Layer w0.254: R2.2 -14.764,-17.75 U2.9
LED3: R3.2 U2.10 | length 12.3
  Bottom Layer w0.254: R3.2 -15.336,-15.464 -13.55,-17.25 U2.10
LED4: R4.2 U2.11 | length 14.7
  Bottom Layer w0.254: R4.2 -16.236,-13.764 -13.25,-16.75 U2.11
NetC5_2: C5.2 U2.6 X1.1 | length 8.2
  Bottom Layer w0.254: C5.2 -11.983,-19.783 X1.1 -11.34,-19.54 -10.7,-18.9 -7.2,-18.9 -6.85,-19.25 U2.6
NetC6_2: C6.2 U2.5 X1.3 | length 4.8
  Bottom Layer w0.254: X1.3 -7.983,-21.183 -7.9,-21.1 -7.9,-20.8 -6.85,-19.75 U2.5
NetC15_1: C15.1 Conn2.1 | length 3.5
  Bottom Layer w0.254: C15.1 -11.745,19.875 Conn2.1
NetC17_2: C17.2 J1.6 R13.2 | length 12.3
  Bottom Layer w0.254: J1.6@25.6,3.2 27.6,1.2 28,1.2 28,-1.2 27.6,-1.2 25.6,-3.2 25.273,-3.527 R13.2 C17.2
NetC18_2: C18.2 R15.2 R19.2 S3.1 | length 4.8
  Bottom Layer w0.254: S3.1 23.05,8.75 R19.2@26.475,8.75 ; R19.2 C18.2
NetConn2_5: Conn2.5 TP5.1 U2.22 | length 47.2
  Top Layer w0.254: v1(-0.321,-7.841) 1.222,-7.841 5.947,-3.117 5.947,12.553 1.619,16.881 1.066,17.434 1.066,17.684 v1(1,17.75)
  Bottom Layer w0.254: TP5.1 -1.27,26.011 Conn2.5 -1.27,19.391 -0.897,19.018 -0.538,19.018 0.664,17.816 ; U2.22 -1.25,-10.517 -0.321,-9.588 v1(-0.321,-7.841)
NetConn2_6: Conn2.6 TP6.1 U2.23 | length 45.5
  Top Layer w0.254: v1(0.25,-8.75) 0.316,-8.684 0.919,-8.684 6.328,-3.274 6.328,12.711 2,17.039 v1(2,19.5)
  Bottom Layer w0.254: U2.23 -0.75,-11 0.25,-10 v1(0.25,-8.75) ; TP6.1 0.327,24.923 1.158,24.092 1.158,22.972 Conn2.6 1.27,20.23 v1(2,19.5)
NetConn2_7: Conn2.7 TP4.1 U2.21 | length 47.6
  Top Layer w0.254: v1(-1,-8.5) -0.196,-9.304 1.416,-9.304 1.565,-9.155 1.565,-8.576 5.807,-4.334 6.494,-4.334 6.709,-4.119 6.709,12.869 4.269,15.308 4.269,16.481 v1(4.25,16.5)
  Bottom Layer w0.254: U2.21 -1.75,-10.203 -1,-9.453 v1(-1,-8.5) ; TP4.1 3.81,27.104 Conn2.7 3.81,16.94 v1(4.25,16.5)
NetConn2_8: Conn2.8 TP3.1 U2.20 | length 46.7
  Top Layer w0.254: v1(-1.834,-9.45) -1.747,-9.45 -1.512,-9.685 1.574,-9.685 1.946,-9.313 1.946,-8.734 5.965,-4.715 6.651,-4.715 7.09,-4.276 7.09,13.026 6.5,13.616 v1(6.5,16.75)
  Bottom Layer w0.254: U2.20 -2.25,-9.866 v1(-1.834,-9.45) ; v1(6.5,16.75) 6.5,22.71 Conn2.8 6.5,23.01 TP3.1
NetD1_2: D1.2 R1.1 | length 2
  Bottom Layer w0.254: D1.2 -15.602,-21.188 R1.1
NetD2_2: D2.2 R2.1 | length 2.1
  Bottom Layer w0.254: D2.2 -16.35,-18.454 R2.1
NetD3_2: D3.2 R3.1 | length 2.1
  Bottom Layer w0.254: D3.2 -18.25,-16.854 R3.1
NetD4_2: D4.2 R4.1 | length 2
  Bottom Layer w0.254: D4.2 -20.15,-15.054 R4.1
NetF1_2: F1.2 P1.A4 P1.A5 P1.A6 P1.B4 P1.B5 P1.B6 P1.C4 P1.C5 P1.C6 P1.P3 P1.P4 TVS1.1
NetJ1_1: J1.1 L1.1 | length 2.5
  Bottom Layer w0.5: L1.1 24.946,1.3 J1.1
NetP1_D3: P1.D3 R14.1 | length 2.4
  Bottom Layer w0.254: R14.1 0.7,5.175 P1.D3
NetP1_D4: P1.D4 R14.2 | length 2.4
  Bottom Layer w0.254: P1.D4 -1,3.475 R14.2
NetP1_D5: P1.D5 R17.2 TP14.1 U2.30 | length 20.4
  Bottom Layer w0.254: P1.D5 -3,1.7 R17.2 -2.2,1.45 -1.25,0.5 TP14.1 -1.25,-4 1.5,-6.75 1.5,-10.25 2.75,-11.5 U2.30
NetP1_D6: P1.D6 R16.2 TP13.1 U2.29 | length 20.7
  Bottom Layer w0.254: P1.D6 -5,1.7 R16.2 -3.75,0.45 -3.75,-2.5 -3.25,-3 1.054,-7.304 1.054,-10.343 2.25,-11.539 U2.29
PACK+: C3.2 F1.1 U3.1
R\S\T\: C13.2 Conn2.10 R7.1 S2.1 TP11.1 U2.7 | length 69.7
  Top Layer w0.254: v1(5,-9.75) 5,-7 6.177,-5.823 6.424,-5.823 7.5,-4.747 7.5,5.943 7.471,5.972 7.471,13.971 v1(11.25,17.75)
  Bottom Layer w0.254: TP11.1 S2.1 S2.1@-5.8,-25.3 ; U2.7 -4.921,-18.75 -4.321,-19.35 -4.321,-21.43 ; R7.1 -2.2,-28.375 ; C13.2 -2.2,-28.375 ; v1(5,-9.75) 5,-12.109 -4.321,-21.43 ; v1(11.25,17.75) 11.25,22.68 Conn2.10 ; S2.1@-5.8,-25.3 -5.127,-25.973 -5.127,-26.173 -4.858,-26.442 -4.858,-27.5 -3.983,-28.375 -2.2,-28.375 ; S2.1@-5.8,-25.3 -5.127,-24.627 -5.127,-24.427 -4.321,-23.621 -4.321,-21.43
RED: Conn1.2 R8.2 | length 2.1
  Bottom Layer w0.254: Conn1.2 -8.75,-6.108 R8.2
SWCLK: H1.2 U2.49 | length 17.2
  Bottom Layer w0.254: U2.49 8.95,-23.75 12,-20.7 15.7,-20.7 16.737,-19.663 H1.2
SWDIO: H1.3 U2.46 | length 10.1
  Bottom Layer w0.254: U2.46 10.05,-20.75 12.263,-18.537 H1.3
USART1_RX: H2.2 U2.43 | length 13.3
  Bottom Layer w0.254: U2.43 9.45,-19.25 13.1,-15.6 H2.2
USART1_TX: H2.3 U2.42 | length 15.7
  Bottom Layer w0.254: U2.42 9.411,-18.75 11.8,-16.361 11.8,-12.7 9.5,-10.4 H2.3
USB_N: R11.2 U2.44 U4.1 | length 38.7
  Bottom Layer w0.254: U2.44 6.474,-19.75 6.51,-19.786 9.786,-19.786 16.2,-13.372 16.2,-8.25 16.2,-8.024 16.049,-7.873 14.531,-7.873 14.38,-7.722 14.38,-7.27 14.531,-7.119 16.049,-7.119 16.2,-6.968 16.2,-4 16.2,-2.7 19.408,0.508 R11.2 22.16,0.461 22.9,-0.279 22.9,-1.817 22.317,-2.4 U4.1
USB_P: R12.2 U2.45 U4.2 | length 35.5
  Top Layer w0.254: v1(21.8,-1.7) 21.866,-1.766 22.166,-1.766 v1(23,-2.6)
  Bottom Layer w0.254: U2.45 9.95,-20.25 16.644,-13.556 16.644,-2.884 19.314,-0.214 21.135,-0.214 21.683,-0.762 R12.2 21.8,-1.122 v1(21.8,-1.7) ; U4.2 22.6,-2.9 22.9,-2.6 v1(23,-2.6)
USER: R15.1 TP12.1 U2.2 | length 62.4
  Top Layer w0.254: v1(-7,-22.8) 8.45,-22.8 25.4,-5.85 v1(25.4,6)
  Bottom Layer w0.254: v1(-7,-22.8) -7,-21.6 -6.65,-21.25 U2.2 ; TP12.1 19.25,4.25 21,6 v1(25.4,6) 25.4,7.1 R15.1
WHITE: Conn3.2 R10.2 | length 9.4
  Bottom Layer w0.254: R10.2 4.2,-3.4 5.1,-4.3 9.762,-4.3 Conn3.2
pads on no net: J1.0 J1.4 P1.0 U2.1 U2.3 U2.4 U2.14 U2.15 U2.16 U2.17 U2.24 U2.25 U2.26 U2.27 U2.28 U2.33 U2.34 U2.35 U2.36 U2.37 U2.38 U2.39 U2.40 U2.41 U2.50 U2.51 U2.52 U2.53 U2.54 U2.55 U2.56 U2.57 U2.61 U2.62 U4.3 U4.4 U4.5

## Polygon pours and split planes (outlines as drawn)
GND on Bottom Layer "GND_L04_P008" (solid, remove dead copper, pour order 8): 0,-30.473 cw(c0,0) -30.473,0 cw(c0,0) 0,30.473 cw(c0,0) 30.473,0 cw(c0,0)
PACK+ on Bottom Layer "PACK+_L04_P006" (solid, remove dead copper, pour order 6): -22.398,6.25 -22.389,6.259 -16.917,6.259 -16.917,3.835 -17,3.752 -14.764,3.752 -14.764,0.903 -22.398,0.903
5V on Bottom Layer "5V_L04_P002" (solid, remove dead copper, pour order 2): -29,6.25 -24.25,6.25 -24.25,1 -27,1 -27,2.25 -29,2.25
NetF1_2 on Bottom Layer "NETF1_2_L04_P000" (solid, remove dead copper, pour order 0): -16.7,13.175 -16.225,13.175 -4.425,13.175 -4.425,16.8 -4.225,17 0.2,17 0.2,4.075 -15.225,4.075 -16.7,4.075 -16.7,6.725
3V3 on Bottom Layer "3V3_L04_P007" (solid, remove dead copper, pour order 7): -28,-4.25 -28,-11.25 -19.75,-11.25 -19.75,-4.25
GND on Top Layer "GND_L01_P009" (solid, remove dead copper, pour order 9): 0,-30.473 cw(c0,0) -30.473,0 cw(c0,0) 0,30.473 cw(c0,0) 30.473,0 cw(c0,0)
GND on GND (split plane): 257 vertices, not listed, extent -29.965,-29.965 29.965,29.965
3V3 on 3V3 (split plane): 257 vertices, not listed, extent -29.965,-29.965 29.965,29.965

## Silkscreen, mask and mechanical layers (free items; w line width, h text height)
Top Overlay:
  drawing of 2 lines, arcs and shapes, not listed
Bottom Overlay:
  lines w0.1: 13,-8.5 13,-9 ; 13.5,-9 13,-9 ; 16.25,-8.25 13.75,-8.25 13,-9 ; 23,-13.75 23,-14.5 ; 23.5,-13 23.5,-14 23,-14.5 ; 23.75,-14.5 23,-14.5 ; 23.75,4.5 24.25,4.5 ; 23.75,5.25 23.75,5 24.25,4.5 ; 24.25,5 24.25,4.5
  text "USER" at 20.25,15.25 h0.8 r90
  text "DFU" at 24,5.75 h1.52
  text "TX" at 9.75,-7.5 h0.8
  text "UART" at 22.5,-9 h1.52
  text "RX" at 16.5,-11.5 h0.8
  text "SW-DP" at 26.5,-12.5 h1.52
  text "GND" at 17.75,-16 h0.8 r40
  text "GND" at 10.75,-16.5 h0.8
  text "SWCLK" at 24,-16.5 h0.8 r40
  text "SWDIO" at 14,-19.5 h0.8 r40
  text "3V3" at 18.5,-21.25 h0.8 r40
  text "BOOT" at 10.25,-28.25 h0.8
  text "RST" at -6.728,-28.619 h0.8
Mechanical 1:
  circle w0.254: c0,0 r30.473

## Text inside footprints (layer, text, board x,y; h text height)
U1: Mechanical 13 "*" at -26.083,-4.307 h1.27 r180
U3: Mechanical 13 "*" at -20.952,6.121 h1.27